# Altium PCB V2.0_2021-01-11_10-17-46.pcbdoc
Units mm, origin at the board's own origin, x right, y up, seen from the top; angles counter-clockwise.
Board outline 129.03 x 9458.64 mm, 2 copper layers (Top Layer, Bottom Layer); 20 components, 66 nets, 123 pads, 108 vias.
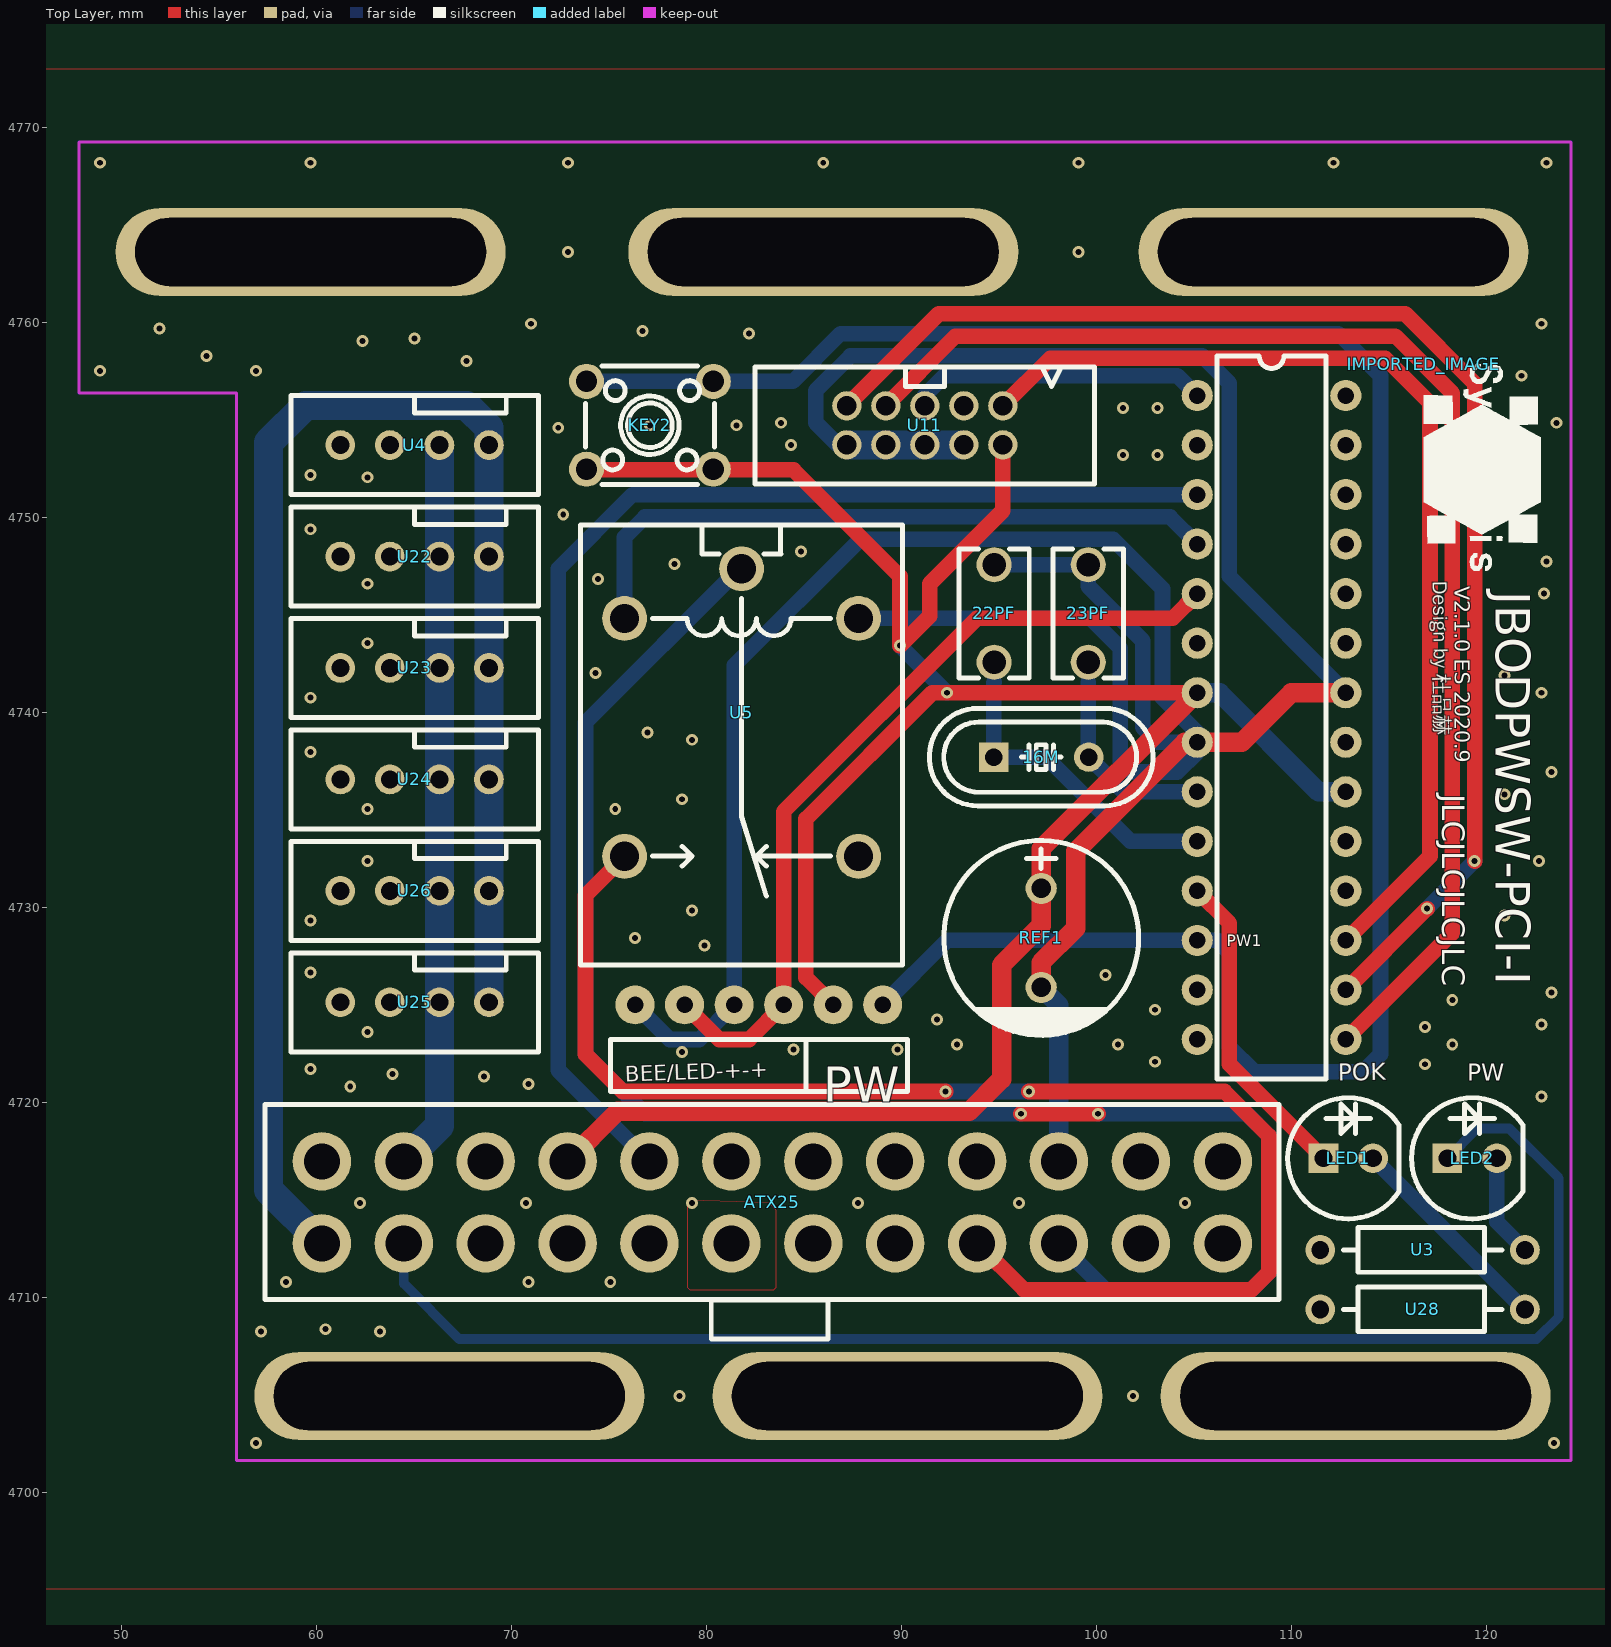
[diagram p0: Top Layer view]
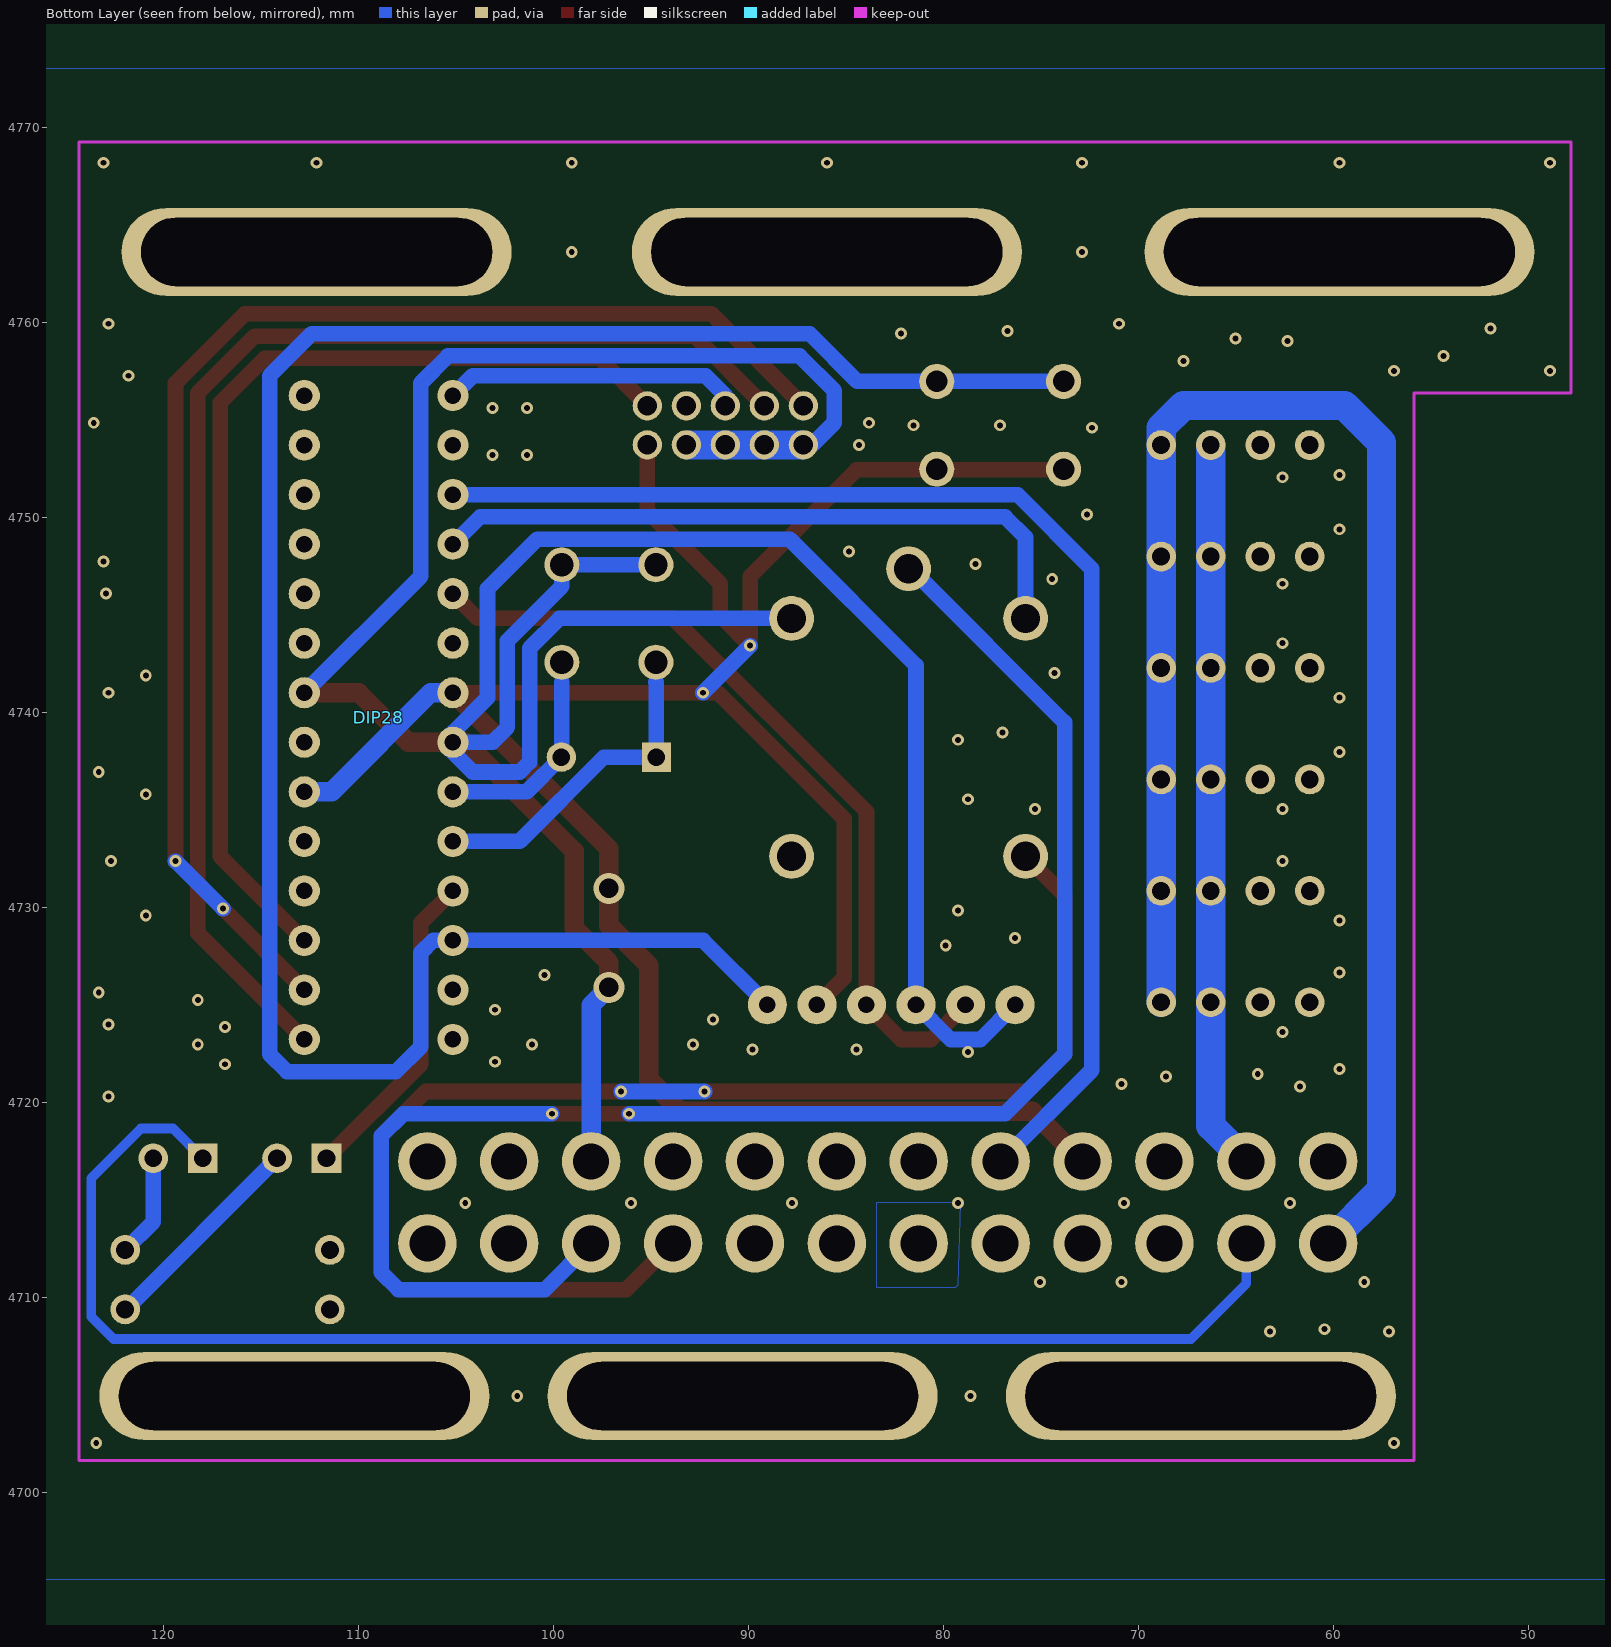
[diagram p1: Bottom Layer view, seen from below]

## Layer stack, top to bottom
Top Layer: signal copper (thickness not stored)
Dielectric: dielectric 0.32, FR-4, Dk 4.8
Bottom Layer: signal copper (thickness not stored)

## Board outline
154.432,25.4 25.4,25.4 25.4,9484.044 154.432,9484.044

## Components (designator, comment, footprint, x,y, rotation, side; value= is the part's Value field where it differs from the comment)
16M "HC-49US_L11.5-W4.5-P4.88" HC-49US_L11.5-W4.5-P4.88 97.155,4737.704 r0 top
22PF "CAP-TH_L6.5-W3.5-P5.00-D1.2" CAP-TH_L6.5-W3.5-P5.00-D1.2 94.742,4745.07 r270 top
23PF "CAP-TH_L6.5-W3.5-P5.00-D1.2" CAP-TH_L6.5-W3.5-P5.00-D1.2 99.568,4745.07 r270 top
ATX25 "ATX-24PIN_1" ATX-24PIN_1 109.347,4709.891 r180 top
DIP28 "_" ATMEGA328P-PU 108.966,4739.736 r270 bottom
IMPORTED_IMAGE "IMPORTED_IMAGE" IMPORTED_IMAGE 116.761,4757.864 r0 top
KEY2 "KEY-TH_4P-L6.0-W6.0-P4.50-LS6.5" KEY-TH_4P-L6.0-W6.0-P4.50-LS6.5 77.089,4754.722 r180 top
LED1 "LED-TH_BD5.9-P2.54-FD" LED-TH_BD5.9-P2.54-FD 112.903,4717.13 r0 top
LED2 "LED-TH_BD5.9-P2.54-FD" LED-TH_BD5.9-P2.54-FD 119.253,4717.13 r0 top
REF1 "CAP-TH_BD10.0-P5.00-D1.0-FD" CAP-TH_BD10.0-P5.00-D1.0-FD 97.155,4728.433 r270 top
U3 "RES-TH_BD2.2-L6.5-P10.50-D0.6" RES-TH_BD2.2-L6.5-P10.50-D0.6 116.713,4712.431 r180 top
U4 "FAN" FAN 58.674,4751.166 r0 top
U5 "RELAY-TH_G5LE-14-XX" RELAY-TH_G5LE-14-XX 81.788,4739.99 r270 top
U11 "CONN-TH_A2005WV-N-2X5P" CONN-TH_A2005WV-N-2X5P 91.186,4754.722 r180 top
U22 "FAN" FAN 58.674,4745.451 r0 top
U23 "FAN" FAN 58.674,4739.736 r0 top
U24 "FAN" FAN 58.674,4734.021 r0 top
U25 "FAN" FAN 58.674,4722.591 r0 top
U26 "FAN" FAN 58.674,4728.306 r0 top
U28 "RES-TH_BD2.2-L6.5-P10.50-D0.6" RES-TH_BD2.2-L6.5-P10.50-D0.6 116.713,4709.383 r180 top

## Footprints (in the part's own frame and the unit in brackets; to place one, negate y for a bottom-side part, rotate by r counter-clockwise, add the part's x,y. Pads: shape width x height; smd on the part's side, far side on the other; paste and mask are expansions set on the pad)
ATMEGA328P-PU [mm]
  round 1.6 hole 0.848: 1(-16.51,3.81) 2(-13.97,3.81) 3(-11.43,3.81) 4(-8.89,3.81) 5(-6.35,3.81) 6(-3.81,3.81) 7(-1.27,3.81) 8(1.27,3.81) 9(3.81,3.81) 10(6.35,3.81) 11(8.89,3.81) 12(11.43,3.81) 13(13.97,3.81) 14(16.51,3.81) 15(16.51,-3.81) 16(13.97,-3.81) 17(11.43,-3.81) 18(8.89,-3.81) 19(6.35,-3.81) 20(3.81,-3.81) 21(1.27,-3.81) 22(-1.27,-3.81) 23(-3.81,-3.81) 24(-6.35,-3.81) 25(-8.89,-3.81) 26(-11.43,-3.81) 27(-13.97,-3.81) 28(-16.51,-3.81)
ATX-24PIN_1 [mm]
  round 3 hole 1.85: 1(2.88,-7.08) 2(7.08,-7.08) 3(11.28,-7.08) 4(15.48,-7.08) 5(19.68,-7.08) 6(23.88,-7.08) 7(28.08,-7.08) 8(32.28,-7.08) 9(36.48,-7.08) 10(40.68,-7.08) 11(44.88,-7.08) 12(49.08,-7.08) 13(2.88,-2.88) 14(7.08,-2.88) 15(11.28,-2.88) 16(15.48,-2.88) 17(19.68,-2.88) 18(23.88,-2.88) 19(28.08,-2.88) 20(32.28,-2.88) 21(36.48,-2.88) 22(40.68,-2.88) 23(44.88,-2.88) 24(49.08,-2.88)
  silkscreen extent 0,-10 52,2.03
CAP-TH_BD10.0-P5.00-D1.0-FD [mm]
  round 1.6 hole 1: 1(-2.54,0) 2(2.54,0)
  silkscreen extent -5,-4.99 5.08,5
CAP-TH_L6.5-W3.5-P5.00-D1.2 [mm]
  round 1.8 hole 1.2: 1(-2.5,0) 2(2.5,0)
  silkscreen extent -3.3,-1.8 3.3,1.8
CONN-TH_A2005WV-N-2X5P [mm]
  round 1.5 hole 1: 1(-4.001,-0.999) 2(-4.001,1.001) 3(-1.999,-1.001) 4(-1.999,0.999) 5(-0.001,-0.999) 6(-0.001,1.001) 7(1.999,-0.999) 8(1.999,1.001) 9(4.001,-1.001) 10(4.001,0.999)
  silkscreen extent -8.71,-3 8.7,3
FAN [mil]
  round 60 hole 36: 1(100,100) 2(200,100) 3(300,100) 4(400,100)
  silkscreen extent 0,0 500,200
HC-49US_L11.5-W4.5-P4.88 [mm]
  rect 1.5x1.5 hole 0.9: 1(-2.438,0)
  round 1.5 hole 0.9: 2(2.438,0)
  silkscreen extent -5.74,-2.5 5.74,2.5
IMPORTED_IMAGE [mm]
  silkscreen extent 0,-10.6 6,0
KEY-TH_4P-L6.0-W6.0-P4.50-LS6.5 [mm]
  round 1.8 hole 1.1: 1(-3.251,-2.25) 2(3.251,-2.25) 3(3.251,2.25) 4(-3.251,2.25)
  silkscreen extent -3.3,-3.05 3.3,3.05
LED-TH_BD5.9-P2.54-FD [mil]
  rect 60x60 hole 36: 1(-50,0)
  round 60 hole 36: 2(50,0)
  silkscreen extent -122,-122 102,122
RELAY-TH_G5LE-14-XX [mm]
  round 2.3 hole 1.5: 1(-7.375,0) 2(-4.825,-6) 3(7.375,-6) 4(7.375,6) 5(-4.825,6)
  silkscreen extent -9.63,-8.25 12.96,8.25
RES-TH_BD2.2-L6.5-P10.50-D0.6 [mil]
  round 60 hole 36: 1(-206.69,0) 2(206.69,0)
  silkscreen extent -160,-45 160,45

## Free pads (board coordinates)
  round 2 hole 0.848: 15(78.867,4725.004) 15(81.407,4725.004) 15(83.947,4725.004) 15(86.487,4725.004) 15(89.027,4725.004) 16(76.327,4725.004)
  oval 20x4.5 hole 3.5 slot 18 at 0 deg: 17(59.69,4763.612) 17(66.802,4704.938) 17(85.979,4763.612) 17(90.297,4704.938) 17(112.141,4763.612) 17(113.284,4704.938)

## Via types
v1: diameter 0.61, hole 0.305, Top Layer to Bottom Layer, 108 vias

## Nets (pads, with @x,y where several pads share a name; then routed paths per layer and width w, separated by ;. In a path a pad name is that pad's centre, name@x,y a point inside that pad or via, vN(x,y) a via of type N, cw(c..) or ccw(c..) an arc to the next point about the centre after c; other vN are vias at no path point)
2: U5.2 | length 34.5
  Bottom Layer w0.8: U5.2@75.789,4744.816 75.789,4748.976 76.835,4750.023 103.759,4750.023 105.156,4748.626
5: U5.5 | length 25
  Bottom Layer w0.8: U5.5@87.787,4744.816 99.695,4744.816 101.219,4743.292 101.219,4737.45 101.727,4736.942 104.14,4736.942 105.156,4737.958 105.156,4738.466
5V0: ATX25.9 REF1.1 | length 48
  Top Layer w1: ATX25.9 75.441,4719.543 93.472,4719.543 95.123,4721.194 95.123,4727.036 97.155,4729.068 REF1.1 97.155,4733.005 105.156,4741.006
12V1: ATX25.11
12V2: ATX25.10
+5V: DIP28.7 DIP28.20 KEY2.3 KEY2.4 pad.15@86.487,4725.004 U11.2 | length 80.4
  Top Layer w0.8: KEY2.3 73.873,4752.436 KEY2.4@80.376,4752.436 ; KEY2.4 KEY2.4@80.376,4752.436 ; pad.15@86.487,4725.004 85.09,4726.401 85.09,4734.529 91.567,4741.006 v1(92.329,4741.006) DIP28.7 ; U11.2 95.186,4750.34 91.44,4746.594 91.44,4744.943 v1(89.916,4743.419) 89.916,4746.975 84.455,4752.436 KEY2.4@80.376,4752.436
  Bottom Layer w0.8: v1(89.916,4743.419) v1(92.329,4741.006)
  Bottom Layer w1: DIP28.7 106.299,4741.006 111.379,4735.926 DIP28.20
-5V: pad.15@81.407,4725.004 pad.16 | length 58.3
  Bottom Layer w0.8: pad.16 78.105,4723.226 79.629,4723.226 81.407,4725.004 81.407,4742.403 87.884,4748.88 100.838,4748.88 103.378,4746.34 103.378,4740.752 105.156,4738.974 105.156,4738.466
A0: DIP28.23
AD1: DIP28.24
AD2: DIP28.25
AD3: DIP28.26
AD4SDA: DIP28.27
AD5SCL: DIP28.28
AGND: DIP28.8 DIP28.22 U11.10 | length 69.5
  Top Layer w1: 97.155,4725.893 97.155,4727.163 98.933,4728.941 98.933,4732.878 104.521,4738.466 DIP28.8 107.442,4738.466 109.982,4741.006 DIP28.22
  Bottom Layer w0.8: U11.10@87.185,4753.724 86.723,4753.724 85.598,4754.849 85.598,4756.5 87.376,4758.278 105.41,4758.278 106.807,4756.881 106.807,4746.975 DIP28.22
AREF: DIP28.21
BEE-: ATX25.17
F5V: U4.3 U22.3 U23.3 U24.3 U25.3 U26.3 | length 37.5
  Bottom Layer w1.5: 64.467,4716.971 66.294,4718.798 U25.3 U26.3 U24.3 U23.3 U22.3 U4.3
FGND: ATX25.24 U4.4 U22.4 U23.4 U24.4 U25.4 U26.4 | length 84.2
  Bottom Layer w1.5: ATX25.24 57.531,4715.507 57.531,4753.833 59.436,4755.738 67.691,4755.738 68.834,4754.595 U4.4 U22.4 U23.4 U24.4 U26.4 U25.4
GND: ATX25.18 ATX25.19 pad.17 U3.2 U28.2
IO0: DIP28.2
IO1: ATX25.8 DIP28.3 | length 66.7
  Bottom Layer w0.8: ATX25.8 72.39,4721.646 72.39,4747.356 76.2,4751.166 DIP28.3
IO2: DIP28.4
IO3: DIP28.5
IO4: DIP28.6
IO5: DIP28.11 LED1.1 | length 16.4
  Top Layer w0.8: DIP28.11 106.807,4729.195 106.807,4721.956 LED1.1
IO7: DIP28.13
IO9: DIP28.15
LED: pad.15@78.867,4725.004 pad.15@83.947,4725.004 | length 42.3
  Top Layer w0.8: pad.15@78.867,4725.004 80.645,4723.226 82.169,4723.226 83.947,4725.004 83.947,4734.91 93.853,4744.816 103.886,4744.816 105.156,4746.086
MISO: DIP28.18
MOSI: DIP28.17 U11.1 | length 53.2
  Top Layer w0.8: U11.1 97.617,4758.151 114.808,4758.151 117.094,4755.865 117.094,4732.624 DIP28.17
N00: ATX25.1
N01: ATX25.13
N02: ATX25.2
N03: ATX25.14
N04: ATX25.4
N05: ATX25.5
N06: ATX25.6
N07: ATX25.20
N08: ATX25.21
N09: ATX25.22
N11: ATX25.23 LED2.1 | length 77.5
  Bottom Layer w0.5: ATX25.23 64.468,4710.701 67.31,4707.859 122.555,4707.859 123.698,4709.002 123.698,4716.114 121.158,4718.654 119.507,4718.654 LED2.1
N12: ATX25.12
N13: U5.4
N15: ATX25.7
PW: DIP28.12 KEY2.1 KEY2.2 pad.15@89.027,4725.004 | length 110.3
  Bottom Layer w0.8: KEY2.2 KEY2.1 84.419,4756.972 86.868,4759.421 112.395,4759.421 114.554,4757.262 114.554,4722.464 113.665,4721.575 108.077,4721.575 106.807,4722.845 106.807,4727.671 106.172,4728.306 DIP28.12 92.329,4728.306 pad.15@89.027,4725.004
PW1: ATX25.16 U5.3 | length 71.1
  Top Layer w0.8: U5.3@75.789,4732.616 73.787,4730.615 73.787,4722.464 75.692,4720.559 v1(92.25,4720.559) ; ATX25.16 93.894,4712.771 96.266,4710.399 107.95,4710.399 108.839,4711.288 108.839,4718.273 106.553,4720.559 v1(96.531,4720.559)
  Bottom Layer w0.8: v1(92.25,4720.559) v1(96.531,4720.559)
PW2: ATX25.15 U5.1 | length 84.2
  Top Layer w0.8: v1(96.12,4719.416) v1(100.076,4719.416)
  Bottom Layer w0.8: U5.1 81.669,4747.364 73.787,4739.482 73.787,4722.464 76.835,4719.416 v1(96.12,4719.416) ; ATX25.15 100.439,4710.399 107.95,4710.399 108.839,4711.288 108.839,4718.273 107.696,4719.416 v1(100.076,4719.416)
RE: DIP28.14
RESET: DIP28.1 U11.5 | length 15.3
  Bottom Layer w0.8: U11.5 91.187,4756.247 92.202,4757.262 104.14,4757.262 DIP28.1
S$21: 
S$23: 
S$38: 
S$42: 
S$46: 
S$3652:  | length 5.8
  Bottom Layer w1.5: 87.249,4753.706 93.091,4753.706
S$3934: ATX25.3 REF1.2 | length 9.3
  Bottom Layer w1: REF1.2 98.067,4724.981 ATX25.3
S$4041: U11.7 | length 67.1
  Top Layer w0.8: U11.7 92.761,4759.294 115.316,4759.294 118.237,4756.373 118.237,4728.687 112.776,4723.226
S$4221: 22PF.1 23PF.1 | length 17.4
  Bottom Layer w0.8: 22PF.1 23PF.1 99.568,4746.467 102.362,4743.673 102.362,4739.228 103.124,4738.466 105.156,4738.466
S$4223: 16M.1 22PF.2 | length 3.9
  Bottom Layer w0.8: 16M.1 94.717,4741.528 94.742,4741.554
S$7646: 
S$7927: LED2.2 U3.1 | length 5.3
  Bottom Layer w0.8: LED2.2 120.523,4713.871 U3.1
S$7929: LED1.2 U28.1 | length 11
  Bottom Layer w0.8: LED1.2 121.92,4709.383 U28.1
SCK: DIP28.19
SS: DIP28.16 U11.9 | length 69.5
  Top Layer w0.8: U11.9 91.9,4760.437 115.824,4760.437 119.38,4756.881 v1(119.38,4732.37) ; DIP28.16 v1(116.945,4729.935)
  Bottom Layer w0.8: v1(116.945,4729.935) v1(119.38,4732.37)
XTAL1: 16M.2 23PF.2 DIP28.9 | length 10.2
  Bottom Layer w0.8: 99.568,4741.554 99.568,4737.729 16M.2 101.372,4735.926 DIP28.9
XTAL2: DIP28.10 | length 12.2
  Bottom Layer w0.8: 94.717,4737.704 97.409,4737.704 101.727,4733.386 DIP28.10
pads on no net: U4.1 U4.2 U11.3 U11.4 U11.6 U11.8 U22.1 U22.2 U23.1 U23.2 U24.1 U24.2 U25.1 U25.2 U26.1 U26.2
copper on no net:
  other v1: 56.896,4702.525 123.444,4702.525 78.613,4704.938 101.854,4704.938 57.15,4708.24 63.246,4708.24 60.452,4708.367 58.42,4710.78 70.866,4710.78 75.057,4710.78 62.23,4714.844 70.739,4714.844 79.248,4714.844 87.757,4714.844 96.012,4714.844 104.521,4714.844 122.809,4720.305 61.722,4720.813 70.866,4720.94 68.58,4721.321 63.881,4721.448 59.69,4721.702 116.84,4721.956 102.997,4722.083 78.74,4722.591 84.455,4722.718 89.789,4722.718 92.837,4722.972 101.092,4722.972 118.237,4722.972 62.611,4723.607 116.84,4723.861 122.809,4723.988 91.821,4724.242 102.997,4724.75 118.237,4725.258 123.317,4725.639 100.457,4726.528 59.69,4726.655 79.883,4728.052 76.327,4728.433 59.69,4729.322 120.904,4729.576 79.248,4729.83 62.611,4732.37 122.682,4732.37 62.611,4735.037 75.311,4735.037 78.74,4735.545 120.904,4735.799 123.317,4736.942 59.69,4737.958 79.248,4738.593 76.962,4738.974 59.69,4740.752 122.809,4741.006 120.904,4741.895 74.295,4742.022 62.611,4743.546 122.936,4746.086 62.611,4746.594 74.422,4746.848 78.359,4747.61 123.063,4747.737 84.836,4748.245 59.69,4749.388 72.644,4750.15 62.611,4752.055 59.69,4752.182 101.346,4753.198 103.124,4753.198 84.328,4753.706 72.39,4754.595 77.089,4754.722 81.534,4754.722 83.82,4754.849 123.571,4754.849 101.346,4755.611 103.124,4755.611 121.793,4757.262 48.895,4757.516 56.896,4757.516 67.691,4758.024 54.356,4758.278 62.357,4759.04 65.024,4759.167 82.169,4759.421 76.708,4759.548 51.943,4759.675 70.993,4759.929 122.809,4759.929 72.898,4763.612 99.06,4763.612 48.895,4768.184 59.69,4768.184 72.898,4768.184 85.979,4768.184 99.06,4768.184 112.141,4768.184 123.063,4768.184

## Polygon pours and split planes (outlines as drawn)
GND on Top Layer (solid): 38.1,4773.01 127.254,4773.01 129.159,4771.105 129.159,4697.953 128.905,4697.699 128.905,4696.048 129.921,4695.032 130.175,4695.032 131.953,4695.032 130.175,4695.032 130.683,4694.27 129.921,4695.032 43.18,4695.032 42.037,4696.175 42.037,4769.073 38.1,4773.01
GND on Bottom Layer (solid): 42.672,4695.667 42.672,4771.486 44.196,4773.01 130.429,4773.01 130.429,4774.534 134.166,4770.797 136.398,4769.327 135.636,4769.327 134.166,4770.797 131.191,4772.756 130.937,4773.01 130.429,4773.01 130.429,4706.843 141.732,4695.54 42.799,4695.54 42.672,4695.667
GND on Top Layer (solid): 78.994,4714.971 78.994,4710.526 79.121,4710.399 83.439,4710.399 83.566,4710.526 83.566,4714.463 83.185,4714.844
GND on Bottom Layer (solid): 79.121,4714.844 83.439,4714.844 83.439,4710.526 79.375,4710.526 79.248,4710.653

## Silkscreen, mask and mechanical layers (free items; w line width, h text height)
Top Overlay:
  lines w0.25 net S$7646: 85.09,4720.559 85.09,4723.226
  lines w0.254: 75.057,4720.559 90.297,4720.559 90.297,4723.226 75.057,4723.226 75.057,4720.559
  text "Design by 杜品赫" at 116.967,4746.721 h1.3 r271
  text "V2.1.0 ES 2020.9" at 118.11,4746.467 h1.3 r270
  text "JBODPWSW-PCI-I" at 119.888,4746.213 h3 r270
  text "JLCJLCJLCJLC" at 117.348,4735.799 h2 r270
  text "PW1" at 106.68,4727.798 h1
  text "BEE/LED-+-+" at 75.833,4721.048 h0.8 r2
  text "POK" at 112.395,4720.813 h1.5 r1
  text "PW" at 118.999,4720.813 h1.5
  text "PW" at 85.979,4720.04 h1.8
Document:
  lines w0.003: 89.891,4754.697 89.941,4754.747